# Altium PCB GSM_Link_12.PcbDoc
Units mil, origin at the board's own origin, x right, y up, seen from the top; angles counter-clockwise.
Board outline 2475 x 3981.25 mil, 2 copper layers (Top Layer, Bottom Layer); 84 components, 61 nets, 392 pads, 21 vias.
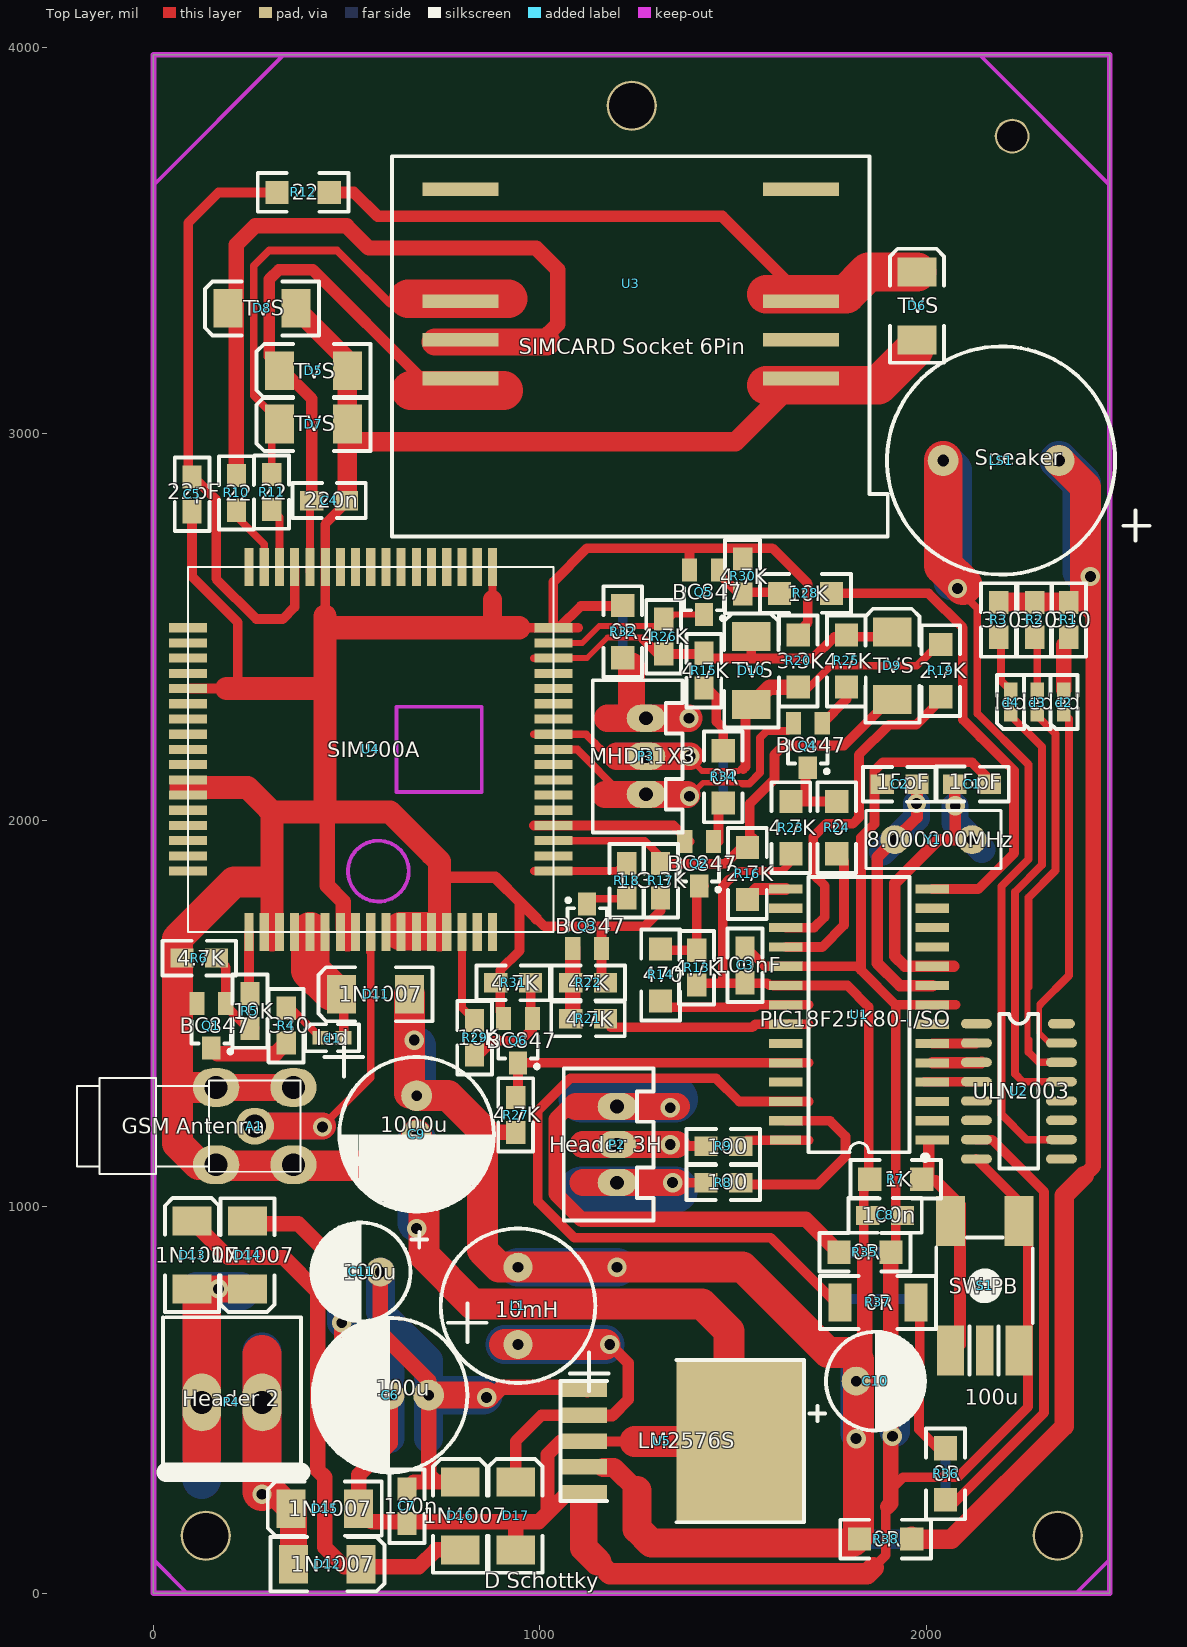
[diagram p0: Top Layer view]
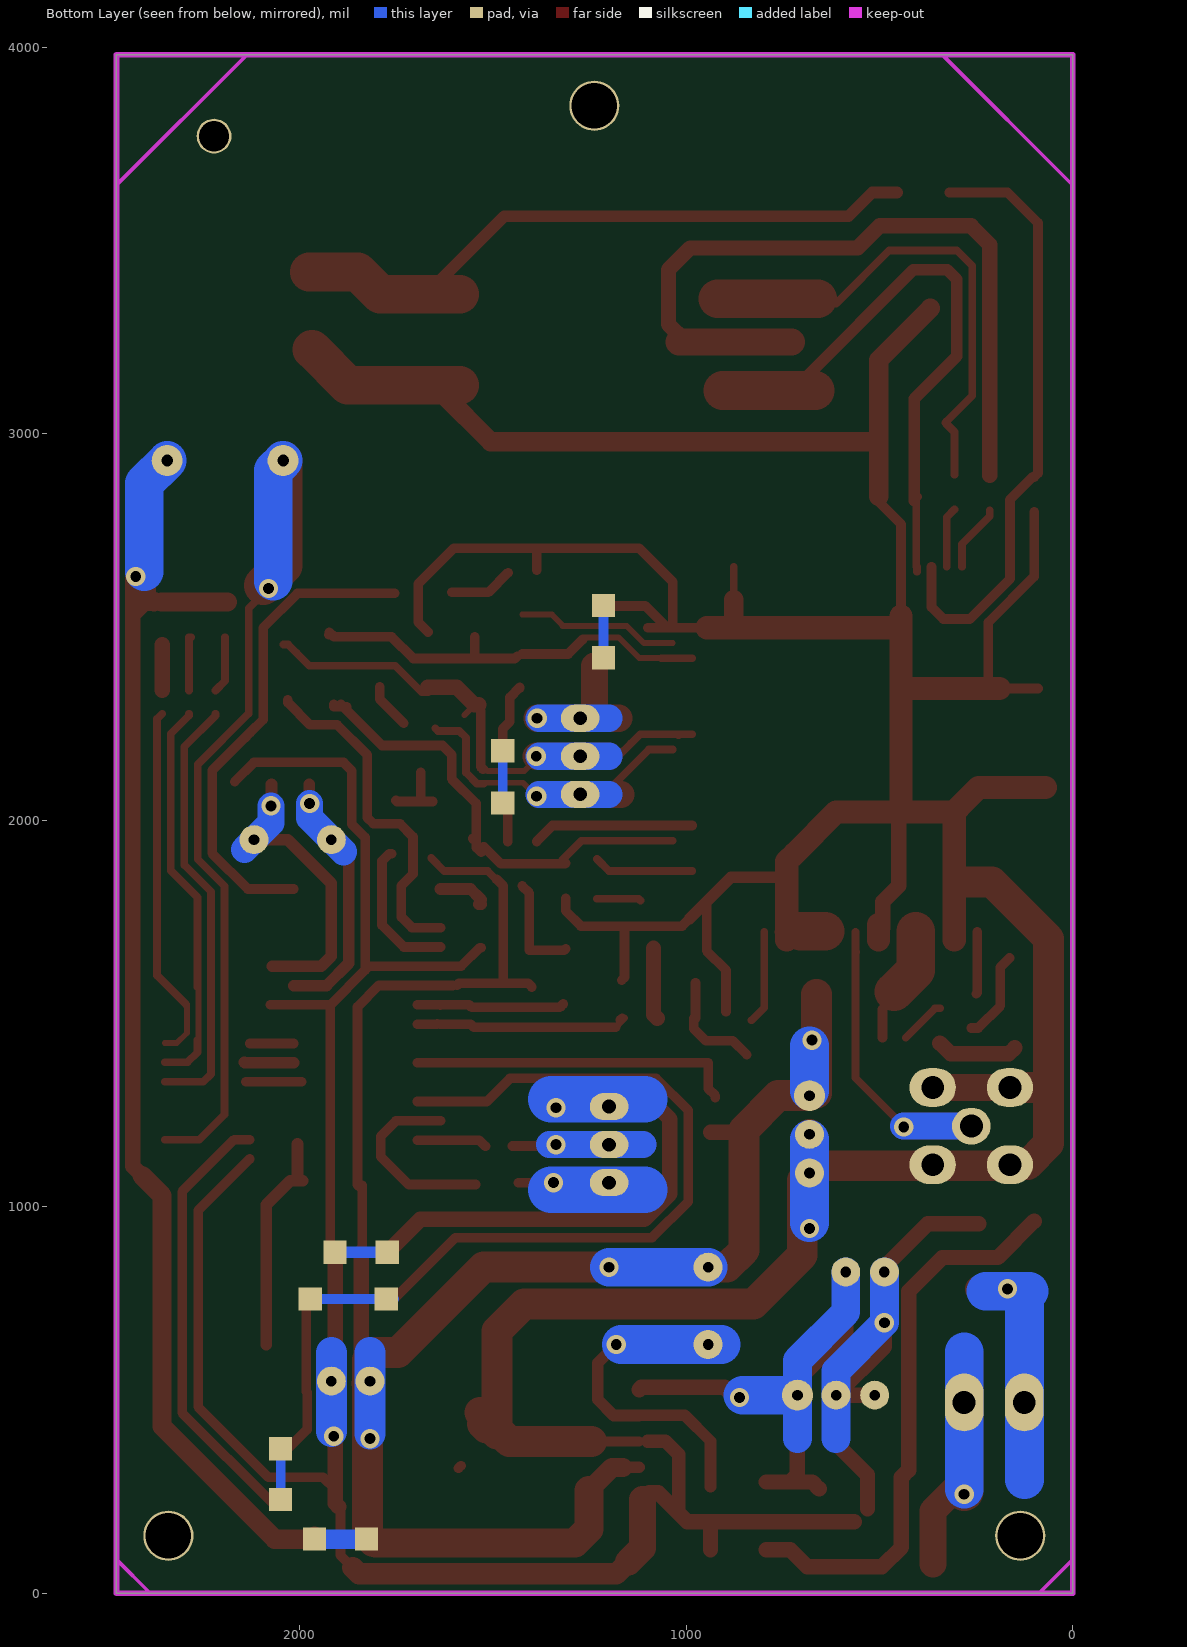
[diagram p1: Bottom Layer view, seen from below]
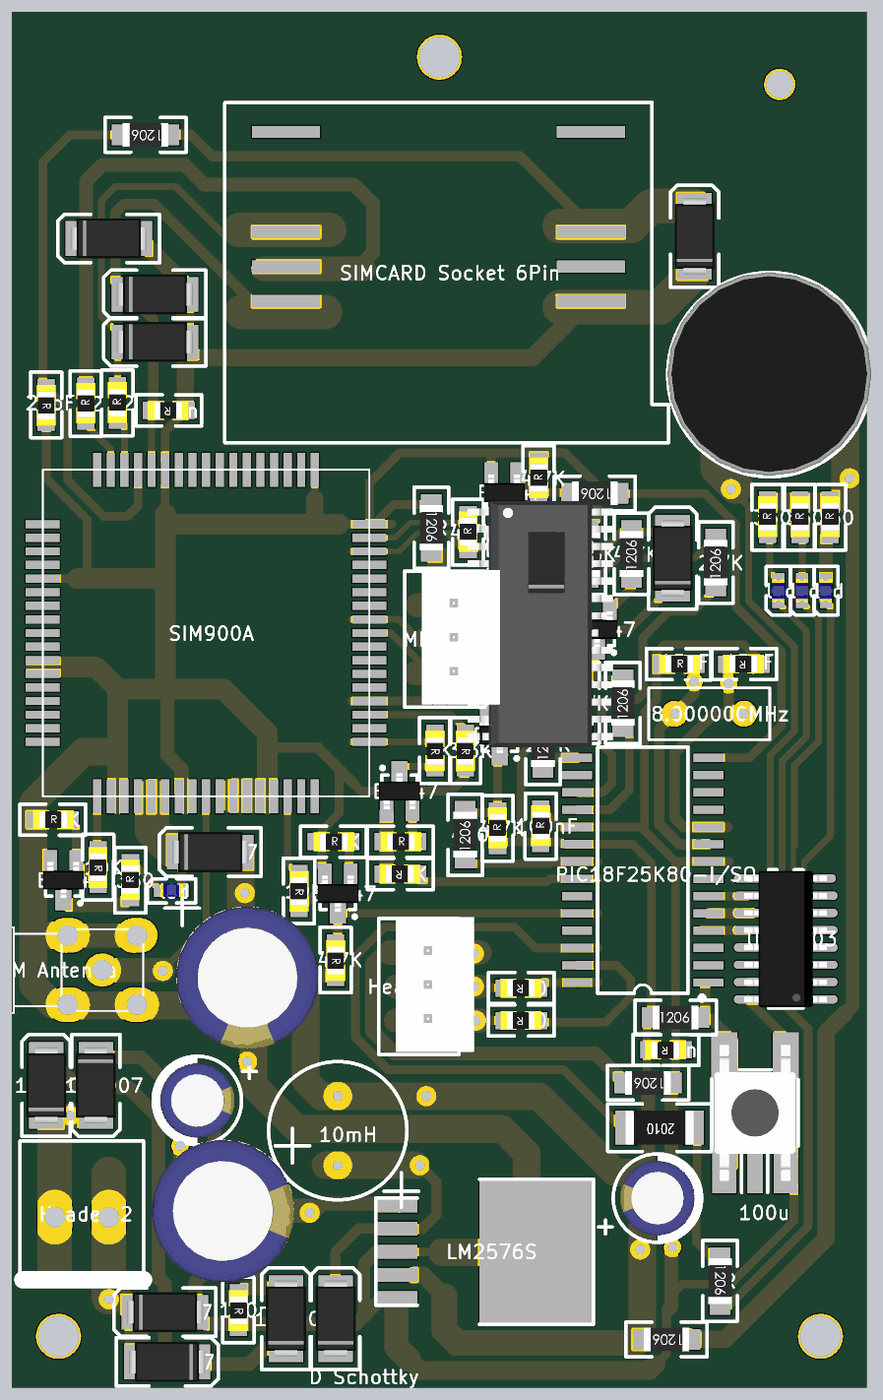
[diagram p2: 3D render of the assembled board from above, using the file's embedded part models]

## Layer stack, top to bottom
Top Layer: signal copper 1.4
Dielectric: dielectric 12.6, FR-4, Dk 4.8
Bottom Layer: signal copper 1.4

## Board outline
0,0 0,3981.25 2475,3981.25 2475,0

## Design rules (kind name [scope] priority, off if disabled: settings)
Clearance [All] p1: gap=15
ComponentClearance [All] p1 off: gap=10 collisioncheckmode=3 verticalgap=10 showdistances=FALSE
HoleSize [All] p1: absolutevalues=TRUE maxlimit=500 minlimit=0 maxpercent=80.000 minpercent=20.000
PolygonConnect [All] p1: connectstyle=Direct reliefconductorwidth=10 reliefentries=4 polygonreliefangle="90 Angle"
RoutingVias [All] p1: holewidth=28 width=50 viastyle="Through Hole" minholewidth=28 minwidth=50 maxholewidth=28 maxwidth=50
SolderMaskExpansion [All] p1: expansion=4
TestPointUsage [All] p1: valid=0 allowmultiple=FALSE
Testpoint [All] p1: side=15 testpointundercomponent=TRUE minsize=40 maxsize=100 preferedsize=60 minholesize=0 maxholesize=40 preferedholesize=32 testpointgrid=1 style=1023 order=0-112345678
Width [All] p1: maxlimit=1000 minlimit=1 preferedwidth=30
17 further rules are at their usual default settings.

## Classes and differential pairs
component class GSM_Link_11_SIM900A: A1 C4 C5 D5 D6 D7 D8 D9 D10 D11 P3 Q2 Q3 Q4 Q5 Q6 R10 R11 R12 R13 R14 R15 R16 R17 R18 R19 R20 R21 R22 R23 R24 R25 R26 R27 R28 R29 R30 R31 U3 U4
component class GSM_Link_11_Power: C6 C7 C8 C9 C11 D12 D13 D14 D15 D16 D17 L1 P4 U5
component class GSM_Link_11_MCU: C1 C2 C3 C10 d1 d2 d3 d4 LS1 P2 Q1 R1 R2 R3 R4 R5 R6 R7 R8 R9 R32 R33 R34 R35 R36 R37 R38 S1 U1 U2 Y1

## Components (designator, comment, footprint, x,y, rotation, side; value= is the part's Value field where it differs from the comment)
A1 "GSM Antenna" "SMA Right Female" 262.5,1208.75 r0 top
C1 "15pF" 0805_smd 2118.75,2093.75 r180 top
C2 "15pF" 0805_smd 1931.25,2093.75 r0 top
C3 "100nF" 0805_smd 1531.25,1625 r270 top
C4 "220n" 0805_smd 455,2827.5 r180 top
C5 "22pF" 0805_smd 100,2843.75 r90 top
C6 "100u" RB.2/.4_p#1 512.5,512.5 r270 top
C7 "100n" 0805_smd 656.25,225 r90 top
C8 "100n" 0805_smd 1893.75,977.5 r180 top
C9 "1000u" RB.2/.4_p#2 681.25,1087.5 r0 top
C10 "100u" RB.1/.2_P 1868.75,548.75 r180 top
C11 "100u" RB.1/.2_P 537.5,831.25 r0 top
d1 "led" 0603_LED_SMD 462.5,1437.5 r180 top
d2 "led" 0603_LED_SMD 2356.25,2306.25 r270 top
d3 "led" 0603_LED_SMD 2287.5,2306.25 r270 top
d4 "led" 0603_LED_SMD 2218.75,2306.25 r270 top
D5 "TVS" 7227_SMD 414.62,3163.27 r180 top
D6 "TVS" 7227_SMD 1976.25,3331.5 r90 top
D7 "TVS" 7227_SMD 414.62,3025.77 r180 top
D8 "TVS" 7227_SMD 281.25,3325 r180 top
D9 "TVS" 7227_SMD 1912.5,2400 r90 top
D10 "TVS" 7227_SMD 1547.5,2387.5 r90 top
D11 "1N4007" 7227_SMD 575,1550 r180 top
D12 "1N4007" 7227_SMD 450,75 r0 top
D13 "1N4007" 7227_SMD 100,875 r90 top
D14 "1N4007" 7227_SMD 243.75,875 r270 top
D15 "1N4007" 7227_SMD 443.75,218.75 r180 top
D16 "1N4007" 7227_SMD 793.75,200 r90 top
D17 "D Schottky" 7227_SMD 937.5,200 r90 top
L1 "10mH" RB.2/.4 943.75,643.75 r270 top
LS1 "Speaker" BZ_KD 2193.75,2931.25 r180 top
P2 "Header 3H" CON3_XH 1200,1062.5 r90 top
P3 "MHDR1X3" CON3_XH 1275,2067.5 r90 top
P4 "Header 2" PCON_2 281.25,493.75 r180 top
Q1 "BC847" SOT23_SMD 150,1468.75 r180 top
Q2 "BC847" SOT23_SMD 1412.5,1887.97 r180 top
Q3 "BC847" SOT23_SMD 1122.5,1726.25 r0 top
Q4 "BC847" SOT23_SMD 1693.75,2193.75 r180 top
Q5 "BC847" SOT23_SMD 1424.9,2590.1 r180 top
Q6 "BC847" SOT23_SMD 943.75,1430 r180 top
R1 "330" 0805_SMD 2368.75,2518.75 r270 top
R2 "330" 0805_SMD 2281.25,2518.75 r270 top
R3 "330" 0805_SMD 2187.5,2518.75 r270 top
R4 "330" 0805_SMD 343.75,1468.75 r270 top
R5 "10K" 0805_SMD 250,1506.25 r90 top
R6 "4.7K" 0805_SMD 118.75,1643.75 r0 top
R7 "1K" 1206_SMD 1921.25,1071.25 r0 top
R8 "100" 0805_SMD 1475,1062.5 r180 top
R9 "100" 0805_SMD 1475,1156.25 r180 top
R10 "22" 0805_SMD 215,2847.5 r270 top
R11 "22" 0805_SMD 306.18,2849.8 r270 top
R12 "22" 1206_SMD 387.5,3625 r180 top
R13 "4.7K" 0805_SMD 1406.25,1618.75 r270 top
R14 "470" 1206_SMD 1312.5,1600 r270 top
R15 "4.7K" 0805_SMD 1425,2387.5 r270 top
R16 "2.7K" 1206_SMD 1537.5,1862.5 r270 top
R17 "3.3K" 0805_SMD 1312.5,1843.75 r90 top
R18 "1K" 0805_SMD 1225,1843.75 r90 top
R19 "2.7K" 1206_SMD 2037.5,2387.5 r270 top
R20 "3.3K" 1206_SMD 1668.75,2412.5 r270 top
R21 "4.7K" 0805_SMD 1125,1486.25 r180 top
R22 "47K" 0805_SMD 1125,1580 r0 top
R23 "4.7K" 1206_SMD 1650,1981.25 r270 top
R24 "0" 1206_SMD 1768.75,1981.25 r270 top
R25 "4.7K" 1206_SMD 1793.75,2412.5 r270 top
R26 "4.7K" 0805_SMD 1320.87,2475.77 r270 top
R27 "4.7K" 0805_SMD 937.5,1237.5 r90 top
R28 "10K" 1206_SMD 1687.5,2587.5 r180 top
R29 "10K" 0805_SMD 831.25,1437.5 r90 top
R30 "4.7K" 0805_SMD 1525,2631.25 r270 top
R31 "4.7K" 0805_SMD 931.25,1580 r0 top
R32 "0R" 1206_SMD 1214.62,2488.27 r90 top
R34 "0R" 1206_SMD 1475,2112.5 r270 top
R35 "0R" 1206_SMD 1841.57,882.18 r180 top
R36 "0R" 1206_SMD 2050,308.75 r90 top
R37 "0R" 2010_SMD 1875,752.5 r180 top
R38 "0R" 1206_SMD 1895,140 r180 top
S1 "SW-PB" switch3_smd 2150,800 r270 top
U1 "PIC18F25K80-I/SO" SOIC28_SMD 2016.25,1172.5 r270 top
U2 "ULN2003" SO-16_smd 2240,1298.75 r270 top
U3 "SIMCARD Socket 6Pin" "SIMCARD Socket - Ejector" 1676.25,3143.75 r180 top
U4 "SIM900A" SIM900A 1035,2656.12 r180 top
U5 "LM2576S" D2PAK_SMD 1518.75,393.75 r180 top
Y1 "8.000000MHz" rad-0.2 2018.75,1950 r180 top

## Footprints (in the part's own frame and the unit in brackets; to place one, negate y for a bottom-side part, rotate by r counter-clockwise, add the part's x,y. Pads: shape width x height; smd on the part's side, far side on the other; paste and mask are expansions set on the pad)
0603_LED_SMD [mm]
  rect 1.05x0.9 smd: A(-0.762,-0.002) K(0.762,-0.002)
  round 0 on Mech3: ""(0,0.002)
  silkscreen extent -1.78,-0.89 1.78,0.89, body extent -0.85,-0.45 0.85,0.45, height 0.9
0805_smd [mil]
  rect 60x50 smd: 1(-45,0) 2(45,0)
  round 0 on Mech3: ""(0,0)
  silkscreen extent -95,-45 95,45, body extent -57,-28 61,27, height 21
0805_SMD [mil]
  rect 60x50 smd: 1(-45,0) 2(45,0)
  round 0 on Mech3: ""(0,0)
  silkscreen extent -95,-45 95,45, body extent -57,-28 61,27, height 21
1206_SMD [mil]
  rect 60x60 smd: 1(-67.5,0) 2(67.5,0)
  round 0 on Mech3: ""(0,0)
  silkscreen extent -117,-50 118,50, body extent -66,-34 66,34, height 33
2010_SMD [mm]
  rect 1.524x2.5 smd: 1(-2.5,0) 2(2.5,0)
  round 0 on Mech3: ""(0,0)
  silkscreen extent -3.81,-1.75 3.81,1.75, body extent -2.5,-1.25 2.5,1.25, height 0.6
7227_SMD [mm]
  rect 1.905x2.54 smd: A(-2.229,0) K(2.229,0)
  round 0 on Mech3: ""(0.006,0)
  silkscreen extent -3.74,-1.78 3.75,1.78, body extent -2.8,-1.48 2.8,1.47, height 2.7
BZ_KD [mil]
  round 80 hole 30: 1(-150,0) 2(150,0)
  silkscreen extent -384,-295 295,295, body extent -294,-297 297,294, height 157
CON3_XH [mm]
  oval 1.778x2.54 hole 0.9: 1(0,0) 2(2.5,0) 3(5,0)
  silkscreen extent -2.5,-2.4 7.5,3.5, body extent -2.31,-2.47 7.59,3.28, height 7
D2PAK_SMD [mil]
  rect 120x40 smd: 1(405,-134) 2(405,-67) 3(405,0) 4(405,67) 5(405,134)
  rect 330x420 smd: 6(0,0)
  silkscreen extent -165,-210 465,210
PCON_2 [mm]
  oval 2.54x3.81 hole 1.5: 1(0,0) 2(3.96,0)
  silkscreen extent -2.56,-5.6 6.52,4.6
rad-0.2 [mm] "Jumper Wire; 2 Leads"
  round 1.905 hole 0.7: 1(-2.54,0) 2(2.54,0)
  silkscreen extent -4.44,-1.91 4.44,1.91
RB.1/.2_P [mm]
  round 1.905 hole 0.7: 1(1.27,0) 2(-1.27,0)
  silkscreen extent -3.25,-3.33 4.33,3.25, body extent -2.75,-2.74 2.73,2.74, height 13.5
RB.2/.4 [mm]
  round 1.905 hole 0.7: 1(0,0) 2(-5.08,0)
  silkscreen extent -7.62,-5.08 3.08,5.94
RB.2/.4_p#1 [mm]
  round 1.905 hole 0.7: 0(0,2.54) 2(0,0)
  round 2.032 hole 0.7: 1(0,5.08)
  silkscreen extent -6.05,-2.54 5.08,8.89, body extent -5.21,-2.69 5.26,7.76, height 17.5
RB.2/.4_p#2 [mm]
  round 2.032 hole 0.7: 1(0,5.08)
  round 1.905 hole 0.7: 2(0,0) 2(0,2.54)
  silkscreen extent -6.05,-2.54 5.08,8.89, body extent -5.21,-2.69 5.26,7.76, height 17.5
SIM900A [mm]
  rect 2.5x0.6 smd: 1(0,20) 2(0,19) 3(0,18) 4(0,17) 5(0,16) 6(0,15) 7(0,14) 8(0,13) 9(0,12) 10(0,11) 11(0,10) 12(0,9) 13(0,8) 14(0,7) 15(0,6) 16(0,5) 17(0,4) 35(24,4) 36(24,5) 37(24,6) 38(24,7) 39(24,8) 40(24,9) 41(24,10) 42(24,11) 43(24,12) 44(24,13) 45(24,14) 46(24,15) 47(24,16) 48(24,17) 49(24,18) 50(24,19) 51(24,20)
  rect 0.6x2.5 smd: 18(4,0) 19(5,0) 20(6,0) 21(7,0) 22(8,0) 23(9,0) 24(10,0) 25(11,0) 26(12,0) 27(13,0) 28(14,0) 29(14.986,0) 30(16,0) 31(17,0) 32(18,0) 33(19,0) 34(20,0) 52(20,24) 53(19,24) 54(18,24) 55(17,24) 56(16,24) 57(15,24) 58(14,24) 59(13,24) 60(12,24) 61(11,24) 62(10,24) 63(9,24) 64(8,24) 65(7,24) 66(6,24) 67(5,24) 68(4,24)
  Top Layer keep-out circle w0.254: c11.5,20 r2
  Top Layer keep-out lines w0.254: 10.3,14.8 10.3,9.2 4.7,9.2 4.7,14.8 10.3,14.8
  silkscreen extent 0,0 24,24
"SIMCARD Socket - Ejector" [mm]
  rect 5x0.9 smd: 0(0,-12.44) 0(22.4,-12.44) 1(0,-5.08) 2(0,-2.54) 3(0,0) 4(22.4,0) 5(22.4,-2.54) 6(22.4,-5.08)
  silkscreen extent -5.7,-14.6 26.9,10.4
"SMA Right Female" [mil] "GSM Antenna Connector"
  oval 120x100 hole 59.06: 1(-100,100) 2(-100,-100) 3(100,-100) 4(100,100)
  oval 100x95 hole 59.06: 5(0,0)
  silkscreen extent -461,-124 118,124
SO-16_smd [mil]
  oval 24x80 smd: 1(-175,-110) 2(-125,-110) 3(-75,-110) 4(-25,-110) 5(25,-110) 6(75,-110) 7(125,-110) 8(175,-110) 9(175,110) 10(125,110) 11(75,110) 12(25,110) 13(-25,110) 14(-75,110) 15(-125,110)
  oval 24x70 smd: 16(-175,110)
  round 0 on Mech3: ""(-128.74,0) ""(0,0) ""(123.23,0)
  silkscreen extent -200,-50 200,50, body extent -197,-120 197,120, height 65
SOIC28_SMD [mm]
  rect 0.6x2.2 smd: 1(0,0) 2(-1.27,0) 3(-2.54,0) 4(-3.81,0) 5(-5.08,0) 6(-6.35,0) 7(-7.62,0) 8(-8.89,0) 9(-10.16,0) 10(-11.43,0) 11(-12.7,0) 12(-13.97,0) 13(-15.24,0) 14(-16.51,0) 15(-16.51,-9.65) 16(-15.24,-9.65) 17(-13.97,-9.65) 18(-12.7,-9.65) 19(-11.43,-9.65) 20(-10.16,-9.65) 21(-8.89,-9.65) 22(-7.62,-9.65) 23(-6.35,-9.65) 24(-5.08,-9.65) 25(-3.81,-9.65) 26(-2.54,-9.65) 27(-1.27,-9.65)
  rect 0.6x2.032 smd: 28(0,-9.65)
  round 0 on Mech3: ""(-15.057,-2.957) ""(-14.955,-6.817) ""(-8.3,-2.957) ""(-8.3,-6.817) ""(-1.315,-2.957) ""(-1.315,-6.817)
  silkscreen extent -17.3,-8.15 1.3,-0.32, body extent -17.3,-10.1 0.78,0.57, height 2.39
SOT23_SMD [mm]
  rect 1x1.5 smd: 1(-0.95,-1.461) 2(0.95,-1.46)
  rect 1.2x1.5 smd: 3(0,1.46)
  round 0 on Mech3: ""(0,0)
  silkscreen extent -1.37,-0.3 1.3,1.83, body extent -1.5,-1.32 1.5,1.32, height 1.08
switch3_smd [mil] "SW?"
  rect 130x75 smd: 1(-162.89,-87.44) 2(-162.89,89.73)
  rect 130x70 smd: 1(172.07,-87.44) 2(172.07,89.73)
  rect 130x45 smd: 3(172.07,1.15)
  silkscreen extent -120,-124 235,126, body extent -192,-117 201,119, height 200

## Part data
A1: library part "SMA KWE-F"
C1 C2 C3 C4 C5 C7 C8: library part Cap, "Capacitor"
C6 C9 C10 C11: library part "Cap Pol1", "Polarized Capacitor (Radial)"
D5 D6 D7 D8 D9 D10: library part "D Schottky", "Schottky Diode"
D11 D12 D13 D14 D15 D16: library part DIODE, "Diode"
D17: "Schottky Diode"
L1: library part Inductor, "Inductor"
LS1: "Loudspeaker"
P2: "Header, 3-Pin, Right Angle"
P3: "Header, 3-Pin"
P4: "Header, 2-Pin"
Q1 Q2 Q3 Q4 Q5 Q6: library part BC547
R1 R2 R3 R4 R5 R6 R7 R8 R9 R10 R11 R12 R13 R14 R15 R16 R17 R18 R19 R20 R21 R22 R23 R24 R25 R26 R27 R28 R29 R30 R31 R32 R34 R35 R36 R37 R38: library part Res1, "Resistor"
S1: "Switch"
U3: library part SIM_SOCKET_6PIN
Y1: library part XTAL, "Crystal Oscillator"

## Free pads (board coordinates)
  round 129.92 hole 118.11: 0(135.75,148.86) 0(1238.12,3849.65) 0(2340.48,148.86)
  rect 60x60 all layers, no hole: 0(1475,2180) 0(1909.07,882.18) 1(1475,2045) 1(1774.07,882.18) 2(2050,242.5) 3(2050,373.75) 4(1973.43,761.25) 5(1776.57,761.25) 6(1962.5,140) 7(1827.5,140) 10(1214.62,2420.77) 11(1214.62,2555.77)
  round 90 hole 78.74: 0(2222.37,3770.91)

## Via types
v1: diameter 50, hole 28, Top Layer to Bottom Layer, 21 vias

## Nets (pads, with @x,y where several pads share a name; then routed paths per layer and width w, separated by ;. In a path a pad name is that pad's centre, name@x,y a point inside that pad or via, vN(x,y) a via of type N, cw(c..) or ccw(c..) an arc to the next point about the centre after c; other vN are vias at no path point)
BUZZER: LS1.2 U2.10 | length 2315.4
  Top Layer w20: v1(2081.25,2600) 2132.5,2548.75 2132.5,2276.78 2264.72,2144.56 2264.72,1899.19 2195,1829.47 2195,1239.08 2260.33,1173.75 U2.10
  Top Layer w100: LS1.2 2043.75,2659.6 v1@2095.43,2607.93
  Bottom Layer w100: LS1.2 2068.75,2906.25 v1@2068.75,2618.75
"DC SUPPLY": D12.K D13.K D16.A | length 1510.4
  Top Layer w40: D13.K 194,868.75 255,868.75 ; 306.25,868.75 255,868.75 ; D16.A 731,112.25 687.5,68.75 493.75,68.75 443.75,118.75 443.75,300 425,318.75 425,781.25 337.5,868.75 255,868.75
GND: A1.1 A1.2 A1.3 A1.4 C1.1 C2.1 C3.1 C4.1 C5.1 C6.0 C6.2 C7.1 C8.1 C9.2 C10.2 C11.2 D5.A D6.A D7.A D8.A D14.A D15.A D17.A P2.3 P3.3 pad.0@1909.07,882.18 pad.1@1774.07,882.18 pad.10 pad.11 Q1.2 Q3.2 Q5.2 Q6.2 R6.1 R17.1 R20.1 R22.2 R30.1 R31.1 R32.1 R32.2 R35.1 R35.2 S1.2 U1.8 U1.19 U2.8 U3.3 U4.17 U4.18 U4.29 U4.39 U4.45 U4.46 U4.53 U4.54 U4.58 U4.59 U4.61 U4.62 U4.63 U4.64 U4.65 U5.3 U5.5 U5.6 | length 23363.3
  Top Layer w20: 877.52,2571.82 U4.18
  Top Layer w25: U4.39 190.12,2341.16 ; C5.1 100,2630.93 218.75,2512.18 218.75,2356.25 ; 444.51,2528.07 444.51,2766.73 C4.1@502.64,2824.86 ; U4.64 740.12,1711.24 U4.65 ; 720.04,1913.87 720.04,1926.08 ; 877.52,2498.64 877.52,2497.5 878.66,2498.64 ; Q6.2@897.6,1505 897.6,1612.5 947.6,1662.5 947.6,1782.64 951.23,1786.27 ; 946.37,2498.64 U4.17 ; 991.34,1746.16 1011.25,1726.25 1162.5,1726.25 ; U4.17@1049.89,2498.64 1106.25,2555 R32.2@1197.5,2555 ; 1099.89,2498.64 U4.17 ; U5.3@1122.5,392.5 1245.87,392.5 ; R22.2@1167.5,1586.25 1159.9,1593.85 Q3.2 1159.9,1723.65 1162.5,1726.25 ; R32.1@1216.25,2420 1251.25,2385 ; P3.3@1232.5,2277.5 1232.5,2385 ; R17.1 1312.5,1766.11 1272.64,1726.25 1162.5,1726.25 ; Q5.2 1387.5,2704.63 ; C3.1 1535.14,1670 1582.64,1622.5 U1.19 1821.25,1622.5 1831.25,1612.5 ; U5.6@1583.37,330 U5.6@1589.62,323.75 ; 1601.25,3068.75 1658.75,3126.25 U3.3 1830,3143.75 ; R20.1@1668.75,2487.5 1693.75,2512.5 1693.75,2612.64 1601.76,2704.63 1387.5,2704.63 ; 1831.25,1862.5 1831.25,1835 ; 1863.38,66.26 1895,97.88 1895,223.75 ; 1908.43,268.43 1940,300 2081.25,300 2263.56,482.31 2263.56,990.19 U2.8 ; R35.1@1921.25,887.5 1921.25,1522.5 ; 2076.25,1522.5 U1.8 1921.25,1522.5 ; C1.1@2168.75,2100 2118.75,2150 1887.5,2150 1866.25,2128.75 1866.25,1990.79 1831.25,1955.79 1831.25,1835 ; U4.17 1035,2617.5 1122.13,2704.63 1387.5,2704.63 ; 1831.25,1612.5 1921.25,1522.5 ; 1831.25,1612.5 1831.25,1835
  Top Layer w30: 740.12,1846.82 746.37,1853.07 884.43,1853.07 951.23,1786.27 991.34,1746.16
  Top Layer w35: 1020,207.5 1020,358.96 1054.79,393.75 U5.3@1100,393.75
  Top Layer w40: D14.A@243.75,956.5 374.75,956.5 C11.2@487.5,843.75 ; 450,2021.82 450,1831.12 491.26,1789.86 491.26,1720.68 496.37,1715.57 ; C11.2 487.5,637.5 C6.0 ; C6.2@518.75,512.5 C6.0 ; D15.A@531.25,218.75 531.25,306.25 612.5,387.5 C6.0 ; D15.A@565.5,184.75 931.25,184.75 ; U4.64 U4.64 ; D17.A 937.5,178.5 931.25,184.75 ; U5.5@1096.5,259.75 1072.25,259.75 1020,207.5 997.25,184.75 931.25,184.75 ; P2.3@1194.35,1265 P2.3 1075,1259.35 1042.5,1226.85 1042.5,1033.51 1108.5,967.5 1688.75,967.5 R35.2 ; 1900,223.75 1908.43,232.18 1908.43,268.43 R35.1@1908.43,869.68
  Top Layer w50: D8.A 502.37,3191.63 D5.A ; C4.1@502.12,2838.27 D5.A@502.12,3163.27 ; D7.A@514.62,2980 1506.25,2980 1631.25,3105 ; 877.52,2498.64 877.52,2571.82 ; 1113.75,117.5 1150,81.25
  Top Layer w55: 1150,81.25 1181.25,50 1847.12,50 1863.38,66.26
  Top Layer w60: 71.37,2085.26 243.22,2085.26 306.65,2021.82 ; 190.12,2341.16 444.51,2341.16 ; 295.26,2033.21 306.65,2021.82 ; 306.65,1690.57 306.65,2021.82 ; 444.51,2528.07 444.51,2498.64 ; 502.62,1690.57 502.62,1729.94 ; 740.12,1690.57 740.12,1711.24 740.12,1846.82 740.12,1893.79 720.04,1913.87 612.09,2021.82 450,2021.82 ; 946.37,2498.64 878.66,2498.64 877.52,2498.64 444.51,2498.64 ; 306.65,2021.82 450,2021.82 ; 444.51,2341.16 444.51,2498.64 ; 444.51,2341.16 444.51,2027.31 450,2021.82
  Top Layer w70: A1.1@177.5,1308.75 A1.4 ; 1093.75,1259.35 P2.3 v1@1354.09,1259.35 ; U5.5@1113.75,242.5 1113.75,117.5 1150,81.25 ; 1175,2264.35 v1(1386.25,2264.35) ; P3.3@1237.5,2264.35 R32.1@1237.5,2399.35
  Top Layer w80: 81.25,1308.75 A1.1 ; A1.2@160.79,1106.25 517.5,1106.25 ; A1.2 117.5,1108.75 62.5,1163.75 62.5,1693.75 193.75,1825 ; 170.21,1801.91 208.87,1840.57 283.87,1840.57 ; 631.25,1106.25 517.5,1106.25 ; C9.2@681.25,1187.5 C9.2@681.25,1087.5 ; 1245.87,392.5 1458.37,392.5 U5.6@1533.75,467.88 ; U5.6@1490,411.63 1490,678.75 1420,748.75 826.25,748.75 700,875 700,1068.75 C9.2@694.27,1074.48 ; U5.6@1517.5,427.5 U5.6@1527.5,437.5 ; 517.5,1106.25 662.5,1106.25 C9.2@681.25,1087.5 ; C9.2@681.25,1087.5 C9.2@694.27,1074.48 ; C9.2@681.25,1087.5 C9.2@694.27,1074.48
  Top Layer w100: U4.62@641.3,1713.16 704.34,1713.16 ; U3.3@1586,3126.25 1658.75,3126.25 1876.25,3126.25 D6.A@1968.75,3218.75
  Bottom Layer w25: pad.10 pad.11
  Bottom Layer w30: pad.1@1774.07,882.18 pad.0@1909.07,882.18
  Bottom Layer w70: 1200,2264.35 v1@1381.25,2264.35
  Bottom Layer w75: C11.2 v1(487.5,700) 612.5,575 C6.0 612.5,400
  Bottom Layer w80: v1@1918.75,418.75 1918.75,622.84
  Bottom Layer w100: v1@681.25,958.41 C9.2@681.25,1175
  Bottom Layer w120: 1108.41,1278.1 1350,1278.1
  other v1: 1912.5,406.25 681.25,943.75 1337.5,1256.25
LED_1: d2.K U2.15 | length 973.7
  Top Layer w15: 2295,1523.75 2292.5,1523.75 2292.5,1450 2318.75,1423.75 U2.15
  Top Layer w20: 2295,1523.75 2369.72,1598.47 2369.72,2103.75 ; d2.K 2369.72,2262.72 2369.72,2103.75 ; 2369.72,2143.75 2369.72,2103.75
LED_2: d3.K U2.14 | length 1021.6
  Top Layer w15: 2262.5,1431.54 2262.5,1566.25 2265,1568.75
  Top Layer w20: 2265,1431.54 2265,1400 2291.25,1373.75 U2.14 ; 2265,1568.75 2265,1800.47 2334.72,1870.19 2334.72,2223.98 2287.44,2271.26 d3.K
LED_3: d4.K U2.13 | length 1123.2
  Top Layer w20: d4.K 2218.69,2271.26 2299.72,2190.23 2299.72,1884.69 2230,1814.97 2230,1343.75 2250,1323.75 U2.13
MB_RX: R8.1 U1.27 | length 500.3
  Top Layer w25: R8.1@1545,1057.5 1718.75,1057.5 1791.25,1130 1791.25,1182.5 1751.25,1222.5 U1.27
MB_TX: R9.1 U1.28 | length 183.1
  Top Layer w25: R9.1 1536.25,1172.5 U1.28 1696.33,1172.5
MCU_DTR: R16.2 U1.15 | length 155.3
  Top Layer w30: R16.2@1531.25,1782.5 R16.2@1537.5,1782.5 ; R16.2@1531.25,1795 1534.38,1798.12 1558.75,1822.5 U1.15 U1.15@1603.75,1822.5
MCU_MCLR: R7.2 S1.1 U1.1 | length 578.3
  Top Layer w30: R7.2@1992.56,1067.5 2025,1067.5 2087.5,1005 S1.1@2087.5,642.5 ; R7.2@2006.25,1067.5 U1.1@2006.25,1162.5
MCU_NRESET: R28.1 U1.14 | length 1285.9
  Top Layer w25: R28.1 2006.25,2587.5 2095,2498.75 2095,2261.25 2128.75,2227.5 ; U1.14 2135,1822.5 2227.22,1914.72 2227.22,2129.03 2128.75,2227.5 ; 2143.75,2212.5 2128.75,2227.5
MCU_RI: R14.2 U1.21 | length 383.4
  Top Layer w25: R14.2@1318.75,1525 1327.5,1516.25 1555.48,1516.25 1561.73,1522.5 U1.21 ; U1.21@1636.96,1521.87 1637.6,1522.5 1696.33,1522.5
MCU_RXD: R24.2 U1.18 | length 373.2
  Top Layer w25: U1.18 1731.25,1672.5 1787.5,1728.75 1787.5,1895 R24.2 ; R24.2@1762.5,1913.75 1767.82,1913.75 R24.2@1768.28,1913.28
MCU_SIM900A_PWRKEY: R21.1 U1.22 | length 540.5
  Top Layer w15: R21.1@1158.37,1488.27 R21.1@1175.92,1470.72 ; 1696.05,1472.22 1696.33,1472.5
  Top Layer w25: R21.1@1165.87,1488.27 R21.1@1170.87,1483.27 ; R21.1@1183.37,1464.52 1550,1464.52 1557.98,1472.5 U1.22 ; U1.22@1644.58,1472.92 1645,1472.5 1696.33,1472.5
MCU_STATUS: Q6.3 R27.2 U1.24 | length 850.3
  Top Layer w25: R27.2@925,1282.5 925,1287.5 943.75,1306.25 Q6.3 1696.33,1372.5
MCU_TXD: R19.2 U1.17 | length 903.2
  Top Layer w25: U1.17 1656.25,1722.5 1710,1722.5 1737.5,1750 1737.5,1831.25 1707.5,1861.25 1707.5,1957.5 1741.25,1991.25 1810.14,1991.25 1826.25,2007.36 1826.25,2170 1903.5,2247.25 1973.89,2247.25 2031.25,2304.61 R19.2@2031.25,2312.5
MCU_VCC: C3.2 C8.2 C9.1 C10.1 D11.A L1.2 LS1.1 pad.6 pad.7 R1.1 R2.1 R3.1 R7.1 R13.2 R23.2 R27.1 R38.1 R38.2 U1.20 U5.4 | length 9885.3
  Top Layer w20: 1487.1,1846.21 1491.37,1850.47 1496.04,1850.47 1514.32,1868.75 1626.25,1868.75 R23.2@1660,1902.5
  Top Layer w25: 862.5,1193.75 863.75,1192.5 ; R13.2@1400,1568.75 1410,1578.75 1473.75,1578.75 ; 1491.58,1847.97 1473.75,1830.14 1473.75,1578.75 ; U1.20@1593.75,1573.75 1588.75,1578.75 1473.75,1578.75 ; U1.20@1605,1572.5 1796.25,1572.5 1851.25,1517.5 1851.25,1056.82 R7.1@1841.25,1046.82 ; R7.1@1838.75,1055 1838.75,861.57 1841.57,858.75
  Top Layer w30: U5.4@1122.5,325.5 1164.62,325.5 1177.93,325.5
  Top Layer w40: 863.75,1192.5 R27.1 ; v1@1836.25,398.75 1841.57,404.07 1841.57,858.75 1841.57,882.18 ; 2397.82,2566.25 2432.5,2531.57 ; 2408.86,1081.07 2432.5,1104.71 2432.5,2531.57 ; 2432.5,2587.5 2432.5,2531.57
  Top Layer w50: U5.4@1164.62,325.5 1177.93,325.5 1192.07,325.5 1252.12,265.45 ; R38.1@1962.5,147.5 R38.1 2065.32,140 2357.23,431.91 2357.23,1029.44 2408.86,1081.07 ; R3.1@2187.5,2565 R1.1@2357.5,2565 ; R1.1@2377.5,2565 2376.25,2566.25 2397.82,2566.25
  Top Layer w75: 1252.12,265.45 1252.12,243.75 ; R38.2@1825,150 1805,130 1288.75,130 1252.12,166.63 1252.12,212.5 ; 1252.12,212.5 1252.12,243.75 ; 1252.12,212.5 1252.12,243.75
  Top Layer w80: C9.1@662.75,1293.75 D11.A ; C9.1 762.5,1287.5 851.25,1198.75 851.25,887.5 895,843.75 L1.2 1368.75,843.75 ; 1500,843.75 1442.5,843.75 ; R38.2@1810.05,133.7 1825,148.65 1825,150 C10.1@1825,542.5 ; 1818.75,622.84 1745.91,622.84 1525,843.75 1442.5,843.75 ; 1825,605 C10.1@1825,542.5 ; C10.1@1826.25,542.5 C10.1@1825,542.5 ; LS1.1 2412.5,2862.5 2412.5,2587.5 ; 1368.75,843.75 1442.5,843.75 ; 1368.75,843.75 1442.5,843.75
  Bottom Layer w50: pad.7 pad.6
  Bottom Layer w80: v1@1818.75,412.5 C10.1 1818.75,622.84
  Bottom Layer w100: C9.1@681.25,1300 v1@681.25,1416.59 ; L1.2 v1(1200,843.75) ; LS1.1 2402.5,2872.5 2402.5,2643.75
  other v1: 1818.75,400 675,1431.25 2425,2631.25
NetC6_1: C6.1 C7.2 C11.1 D16.K U5.1 | length 1837.7
  Top Layer w40: C11.1 587.5,675 712.5,550 C6.1 712.5,306.25 725,293.75 ; C7.2 674,287.75 D16.K 725,287.75 ; v1@868.62,500.12 901.25,532.75 U5.1@1113.75,532.75 ; U5.1@1116.25,532.75 U5.1@1122.5,526.5
  Top Layer w70: C6.1 v1@862.5,512.5
  Bottom Layer w75: C11.1 587.5,727.28 712.5,602.28 C6.1 712.5,400
  Bottom Layer w100: C6.1@725,512.5 v1@854.09,512.5
  other v1: 862.5,506.25
Netd1_K: d1.K R4.1 | length 120.3
  Top Layer w20: R4.1 356.31,1513.75 d1.K
Netd2_A: d2.A R1.2 | length 118.7
  Top Layer w40: d2.A R1.2@2356.19,2454.94
Netd3_A: d3.A R2.2 | length 137.5
  Top Layer w20: R2.2 R2.2 ; d3.A R2.2@2287.44,2473.69
Netd4_A: d4.A R3.2 | length 147.8
  Top Layer w20: R3.2@2193.75,2473.75 2193.75,2361.19 d4.A
NetD6_K: D6.K R12.1 U3.1 | length 1782
  Top Layer w20: U3.1 U3.1@1691.25,3343.75
  Top Layer w25: 1646.3,3388.7 U3.1@1691.25,3343.75
  Top Layer w30: R12.1 518.75,3625 580.48,3563.27 1471.73,3563.27 1646.3,3388.7
  Top Layer w100: U3.1@1586,3361.25 1792.5,3361.25 1850.5,3419.25 D6.K
NetD7_K: D7.K R11.1 U3.6 | length 1306.3
  Top Layer w20: R11.1 306.18,3005.08 D7.K D7.K@330.12,3029.02 ; D7.K@327.12,3032.02 260,3099.13 260,3435 300,3475 475,3475 612.5,3337.5 650,3337.5 ; 639.62,3382.02 645.87,3375.77
  Top Layer w100: 659.75,3350 918.75,3350
NetD8_K: D8.K R10.1 U3.5 | length 2221.8
  Top Layer w20: R10.1@215,2912.5 220,2907.5 R10.1@220,2902.5 ; U3.5 1006.25,3243.75 1011.25,3243.75
  Top Layer w40: R10.1 215,2912.5 215,3325 215,3490 263.27,3538.27 500,3538.27 557.02,3481.25 990.38,3481.25 1046.25,3425.38 1046.25,3283.75 1006.25,3243.75 1000,3237.5
  Top Layer w70: U3.5@728.5,3237.5 1000,3237.5 1018.75,3237.5
NetD17_K: D17.K L1.1 U5.2 | length 1196.3
  Top Layer w30: D17.K@937.5,275 D17.K 937.5,393.75 1004.5,460.75 U5.2 ; U5.2@1113.75,460.25 U5.2@1121.75,460.25 ; 1180.25,460.25 U5.2@1121.75,460.25 ; v1(1181.25,643.75) 1229.38,595.62 1229.38,501.38 1187.5,459.5 1122.5,459.5 U5.2@1121.75,460.25
  Top Layer w80: L1.1@908.41,643.75 v1@1168.75,643.75
  Bottom Layer w100: L1.1@909.66,643.75 v1@1168.75,643.75
NetP2_1: P2.1 R8.2 | length 718.2
  Top Layer w25: P2.1 R8.2@1435,1062.5
  Top Layer w70: 1112.5,1062.5 v1@1354.09,1062.5
  Bottom Layer w120: 1108.41,1043.75 v1@1350,1043.75
  other v1: 1343.75,1062.5
NetP2_2: P2.2 R9.2 | length 629.8
  Top Layer w25: 1303.43,1157.5 R9.2@1450,1157.5
  Top Layer w70: 1112.5,1160.93 v1@1354.09,1160.93
  Bottom Layer w70: 1112.5,1160.93 v1@1354.09,1160.93
  other v1: 1337.5,1160.93
NetQ1_1: Q1.1 R5.1 R6.2 | length 232.5
  Top Layer w25: R6.2 187.4,1620.1 187.4,1519.96 244.86,1462.5 R5.1@262.5,1462.5
NetQ1_3: Q1.3 R4.2 | length 211.4
  Top Layer w40: Q1.3 165,1396.25 316.25,1396.25 R4.2
NetQ2_1: pad.0@1475,2180 pad.1@1475,2045 Q2.1 R15.2 R34.1 R34.2 | length 420.2
  Top Layer w25: R15.2@1431.25,2342.5 1431.25,2343.75 1456.88,2318.12 1456.88,2255.62 1475,2237.5 R34.1 ; Q2.1@1462.4,1945.47 R34.2@1462.4,2038.85 ; R34.2 R34.2@1481.15,2038.85
  Bottom Layer w25: pad.1@1475,2045 pad.0@1475,2180
NetQ2_3: Q2.3 R13.1 R14.1 | length 269.8
  Top Layer w25: R14.1 1316.25,1663.75 R13.1 1406.25,1811.72 Q2.3@1425,1830.47
NetQ3_1: Q3.1 R21.2 R22.1 | length 287.6
  Top Layer w15: R21.2@1064.62,1488.27 1077.5,1501.15 R22.1@1077.5,1586.25
  Top Layer w40: R21.2@1075.87,1488.27 1085.1,1497.5 Q3.1
NetQ3_3: Q3.3 R18.1 | length 114.6
  Top Layer w20: Q3.3@1118.75,1792.5 1123.75,1797.5 R18.1@1231.25,1797.5
NetQ4_1: Q4.1 R25.2 | length 119.7
  Top Layer w25: Q4.1 1793.75,2313.85 R25.2
NetQ4_3: Q4.3 R23.1 R24.1 | length 173.6
  Top Layer w25: R23.1@1656.25,2048.75 1693.75,2048.75 ; Q4.3@1687.5,2123.75 1687.5,2055 1693.75,2048.75 ; R24.1@1751.25,2051.25 1748.75,2048.75 1693.75,2048.75
NetQ5_1: Q5.1 R28.2 R30.2 | length 167.4
  Top Layer w25: Q5.1@1461.25,2641.25 1512.4,2590.1 R28.2@1607.5,2590.1
NetQ6_1: Q6.1 R29.1 R31.2 | length 284.2
  Top Layer w25: R29.1@843.75,1393.75 880,1430 950,1430 981.15,1461.15 Q6.1 ; Q6.1@976.25,1487.5 R31.2
P_BUZZER: pad.2 pad.3 pad.4 pad.5 R36.1 R36.2 R37.1 R37.2 U1.26 U2.7 | length 3776.8
  Top Layer w25: 1696.33,1272.5 U1.26 1516.25,1272.5 1456.25,1332.5 1078.51,1332.5 995,1248.99 995,1013.83 1088.83,920 1597.5,920 R37.2@1756.25,761.25 ; pad.4 1983.75,750.93 1983.75,521.83 1981.25,519.33 1981.25,423.75 R36.2@2043.75,361.25 ; R36.1@2043.75,233.75 2050,233.75 2071.57,233.75 2304.73,466.91 2304.73,1039.28 2170.26,1173.75 U2.7
  Bottom Layer w25: pad.5@1756.25,761.25 pad.4@1944.68,761.25 ; pad.2 pad.3@2050,377.5
P_LED_1: U1.6 U2.2 | length 113.8
  Top Layer w25: U1.6 U2.2@2130,1422.5
P_LED_2: U1.5 U2.3 | length 128
  Top Layer w30: U1.5 2142.5,1372.5 U2.3@2143.75,1373.75
P_LED_3: U1.4 U2.4 | length 145
  Top Layer w25: U1.4@1995,1323.75 U2.4@2140,1323.75
S1: D12.A D15.K P4.1 | length 938.3
  Top Layer w70: 300,275 362.25,212.75 D12.A
  Top Layer w100: v1@281.25,262.5 P4.1 281.25,618.75
  Bottom Layer w100: v1@281.25,268.75 281.25,625
  other v1: 281.25,256.25
S2: D13.A D14.K P4.2 | length 1112.5
  Top Layer w70: D13.A@118.75,787.25 D14.K
  Top Layer w100: 125,350 D13.A@125,756.25
  Bottom Layer w100: 112.5,781.25 225,781.25 ; 125,293.75 125,762.5
  other v1: 168.75,787.5
SIM900A_DTR: D9.A R16.1 R17.2 U4.3 | length 1224.7
  Top Layer w20: U4.3 1271.29,1947.46 R17.2@1321.25,1897.5
  Top Layer w25: R17.2 1313.28,1887.97 1480.51,1887.97 1523.78,1931.25 R16.1@1525,1931.25 ; R16.1@1531.25,1917.5 1543.75,1930 R16.1@1543.75,1943.75 ; R16.1@1553.12,1953.12 R16.1@1543.75,1943.75 ; D9.A@1878.49,2293.75 D9.A@1887.5,2293.75 ; D9.A@1893.75,2300 D9.A@1887.5,2293.75 ; D9.A@1912.5,2299.75 1912.5,2293.75 D9.A@1887.5,2293.75 ; R16.1@1543.75,1943.75 1543.75,2043.79 1607.5,2107.54 1607.5,2170 1631.25,2193.75 1659.21,2193.75 ; 1659.21,2193.75 1668.75,2193.75 ; 1659.21,2193.75 1668.75,2193.75 ; 1668.75,2193.75 1787.5,2193.75 D9.A@1887.5,2293.75
SIM900A_NETLIGHT: R5.2 U4.52 | length 175.5
  Top Layer w25: U4.52@247.6,1696.73 U4.52 247.6,1553.65 R5.2
SIM900A_NRESET: Q5.3 R26.1 U4.16 | length 422.4
  Top Layer w15: U4.16 1110.02,2459.27 1154.02,2503.27 R26.1@1318.75,2503.27 ; R26.1@1320.87,2503.27 R26.1@1318.75,2503.27 ; Q5.3 1348.08,2532.6 R26.1@1318.75,2503.27
SIM900A_PWRKEY: R18.2 U4.1 | length 259.2
  Top Layer w20: 985,1868.72 U4.1 1199.97,1868.72 R18.2@1231.25,1900
SIM900A_RF_ANT: A1.5 U4.60 | length 1076.9
  Top Layer w20: A1.5@252.5,1208.75 A1.5 377.5,1208.75 412.5,1208.75 ; v1@437.5,1208.75 562.56,1333.81 562.56,1661.12 ; 560.79,1659.35 562.56,1661.12 ; U4.60@562.56,1681.25 562.56,1661.12 ; U4.60 562.56,1661.12
  Top Layer w70: A1.5@272.5,1208.75 377.5,1208.75 v1@437.5,1208.75
  Bottom Layer w70: A1.5 v1@437.5,1208.75
  other v1: 437.5,1206.25
SIM900A_RI: Q2.2 U4.4 | length 419.7
  Top Layer w25: 985,1986.83 U4.4 1346.24,1986.83 Q2.2@1387.6,1945.47
SIM900A_RXD: D10.A P3.2 R19.1 R20.2 U4.10 | length 1790.2
  Top Layer w15: v1@1381.25,2165.93 1419.68,2127.5 1514.32,2127.5 1522.85,2136.03 ; D10.A@1575,2272.25 1548.5,2298.75 D10.A D10.A@1575.25,2327.5
  Top Layer w20: 985,2223.05 U4.10 1119.45,2223.05 1143.75,2198.75 ; U4.10@1020,2221.12 U4.10@1020.63,2220.49 ; 1162.5,2180 1143.75,2198.75 ; 1200,2165.93 1176.57,2165.93 1143.75,2198.75 ; P3.2@1227.5,2167.5 1235.93,2167.5 1237.5,2165.93 P3.2 1381.25,2165.93 v1(1388.43,2165.93) v1@1390,2167.5 ; R20.2@1668.75,2331.25 1684.64,2331.25 1753.39,2400 1975.5,2400 2008.52,2433.01 2030.5,2455 R19.1@2042.5,2455
  Top Layer w25: 1526.39,2132.5 1532.5,2138.61 1532.5,2207.5 1532.5,2283.75 1547.5,2298.75 D10.A
  Top Layer w40: D10.A@1537.5,2298.75 1547.5,2298.75 1548.5,2298.75 1594.75,2345 R20.2
  Top Layer w70: 1200,2165.93 1237.5,2165.93 P3.2 1381.25,2165.93 v1(1388.43,2165.93)
  Bottom Layer w70: 1200,2165.93 v1@1381.25,2165.93
SIM900A_SIM_CLK: R11.2 U4.32 | length 157
  Top Layer w20: R11.2 326.34,2784.64 U4.32
SIM900A_SIM_DATA: C5.2 R12.2 U4.31 | length 1579.4
  Top Layer w25: R12.2 168.75,3625 90,3546.25 90,2898.75 C5.2 103.89,2888.75 162.5,2830.14 162.5,2625 266.38,2521.12 335,2521.12 365.71,2551.83 U4.31
SIM900A_SIM_RST: R10.2 U4.33 | length 176.2
  Top Layer w20: R10.2 215,2786.8 286.97,2714.83 U4.33
SIM900A_SIM_VCC: C4.2 D5.K U3.4 U4.30 | length 1702.9
  Top Layer w20: C4.2@400,2837.5 405.08,2832.42 U4.30 ; U4.30@403.21,2643.75 U4.30@403.21,2656.12 ; U3.4@696.63,3143.75 706.25,3143.75 U3.4
  Top Layer w30: 300,3340.45 300,3322.5 ; C4.2 410,3090.77 300,3200.77 300,3322.5 ; U3.4@706.25,3143.75 693.75,3143.75 412.5,3425 325,3425 300,3400 300,3322.5
  Top Layer w100: 666,3112.5 906.25,3112.5
SIM900A_STATUS: R29.2 U4.66 | length 242.2
  Top Layer w20: U4.66 798.78,1514.97 R29.2
SIM900A_TXD: P3.1 Q4.2 U4.9 | length 1050.3
  Top Layer w15: v1@1393.75,2068.75 1422.5,2097.5 1537.5,2097.5
  Top Layer w20: U4.9 1097.57,2183.68 1097.57,2182.43 1212.5,2067.5 ; P3.1@1232.5,2067.5 1237.5,2067.5 P3.1@1260,2045 ; 1525,2095 1541.92,2095 1570,2123.08 1570,2154.14 1570,2213.75 1587.5,2231.25 1642.6,2231.25 Q4.2@1650.1,2238.75
  Top Layer w70: 1168.75,2067.5 1212.5,2067.5 P3.1 v1@1381.25,2067.5
  Bottom Layer w70: 1200,2067.5 v1@1381.25,2067.5
  other v1: 1387.5,2062.5
SIM900A_VBAT: d1.A D11.K U4.55 U4.56 U4.57 | length 253.2
  Top Layer w25: d1.A D11.K@492.5,1511.25
  Top Layer w100: U4.56@406.25,1712.49 406.25,1612.5 D11.K@462.5,1556.25
SIM900A_VDD_EXT: D9.K D10.K R15.1 R25.1 R26.2 U4.15 | length 1147.9
  Top Layer w15: U4.15@1065,2419.9 1121.93,2419.9 1175.3,2473.27 1268.27,2473.27
  Top Layer w20: 985,2419.9 U4.15 ; U4.15 1065,2419.9 U4.15
  Top Layer w25: 1268.27,2468.27 1305.77,2430.77 R26.2 R15.1@1425,2430.77 ; R15.1@1437.5,2425 1443.75,2418.75 1543.75,2418.75 ; D10.K 1547.5,2422.5 1543.75,2418.75 ; 1584.86,2418.75 1642.5,2418.75 ; 1762.75,2475.11 1706.39,2418.75 1642.5,2418.75 ; 1762.75,2475.25 1768.75,2475.25 1912.5,2475.25 D9.K@1917.25,2480 ; D9.K@1923.75,2486.5 D9.K@1917.25,2480 ; D9.K@1925,2480 D9.K@1917.25,2480 ; 1543.75,2418.75 1642.5,2418.75
XTAL_1: C2.2 U1.9 Y1.2 | length 874.1
  Top Layer w30: Y1.2@1911.93,1943.18 1873.75,1905 1873.75,1630.1 1931.35,1572.5 U1.9 ; Y1.2 1976.25,2007.5 C2.2 v1@1976.25,2043.75
  Bottom Layer w70: 1887.5,1918.75 1975,2006.25 v1(1975,2043.75)
XTAL_2: C1.2 U1.10 Y1.1 | length 886
  Top Layer w30: 2068.75,1950 2075,1956.25 v1(2075,2037.5) ; 2071.25,1622.5 U1.10 1944.99,1622.5 1918.75,1648.74 1918.75,1837.5 2031.25,1950 Y1.1 ; v1@2073.75,2037.5 C1.2
  Bottom Layer w70: v1(2075,2037.5) 2075,1993.75 Y1.1@2143.75,1925
pads on no net: C1. C2. C3. C4. C5. C7. C8. d1. d2. d3. d4. D5. D6. D7. D8. D9. D10. D11. D12. D13. D14. D15. D16. D17. Q1. Q2. Q3. Q4. Q5. Q6. R1. R2. R3. R4. R5. R6. R7. R8. R9. R10. R11. R12. R13. R14. R15. R16. R17. R18. R19. R20. R21. R22. R23. R24. R25. R26. R27. R28. R29. R30. R31. R32. R34. R35. R36. R37. R38. S1.3 U1. U1.2 U1.3 U1.7 U1.11 U1.12 U1.13 U1.16 U1.23 U1.25 U2. U2.1 U2.5 U2.6 U2.9 U2.11 U2.12 U2.16 U3.0 U3.2 U4.2 U4.5 U4.6 U4.7 U4.8 U4.11 U4.12 U4.13 U4.14 U4.19 U4.20 U4.21 U4.22 U4.23 U4.24 U4.25 U4.26 U4.27 U4.28 U4.34 U4.35 U4.36 U4.37 U4.38 U4.40 U4.41 U4.42 U4.43 U4.44 U4.47 U4.48 U4.49 U4.50 U4.51 U4.67 U4.68

## Keep-outs
Keep-Out Layer:
  lines w10: 0,87.5 87.5,0 ; 0,3643.75 334.38,3978.12 ; 2137.5,3981.25 2471.88,3646.88 ; 2387.5,0 2475,87.5
  lines w15: 0,0 0,3981.25 2475,3981.25 2475,0 0,0

## Silkscreen, mask and mechanical layers (free items; w line width, h text height)
Mechanical 4:
  drawing of 298 lines, arcs and shapes, not listed
Mechanical 5:
  drawing of 342 lines, arcs and shapes, not listed